# Altium PCB Terra_Spray.PcbDoc
Units mil, origin at the board's own origin, x right, y up, seen from the top; angles counter-clockwise.
Board outline 1779.53 x 1536.61 mil, 4 copper layers (Top Layer, GND, Power, Bottom Layer), stack 61.811 mil thick; 61 components, 32 nets, 213 pads, 377 vias.
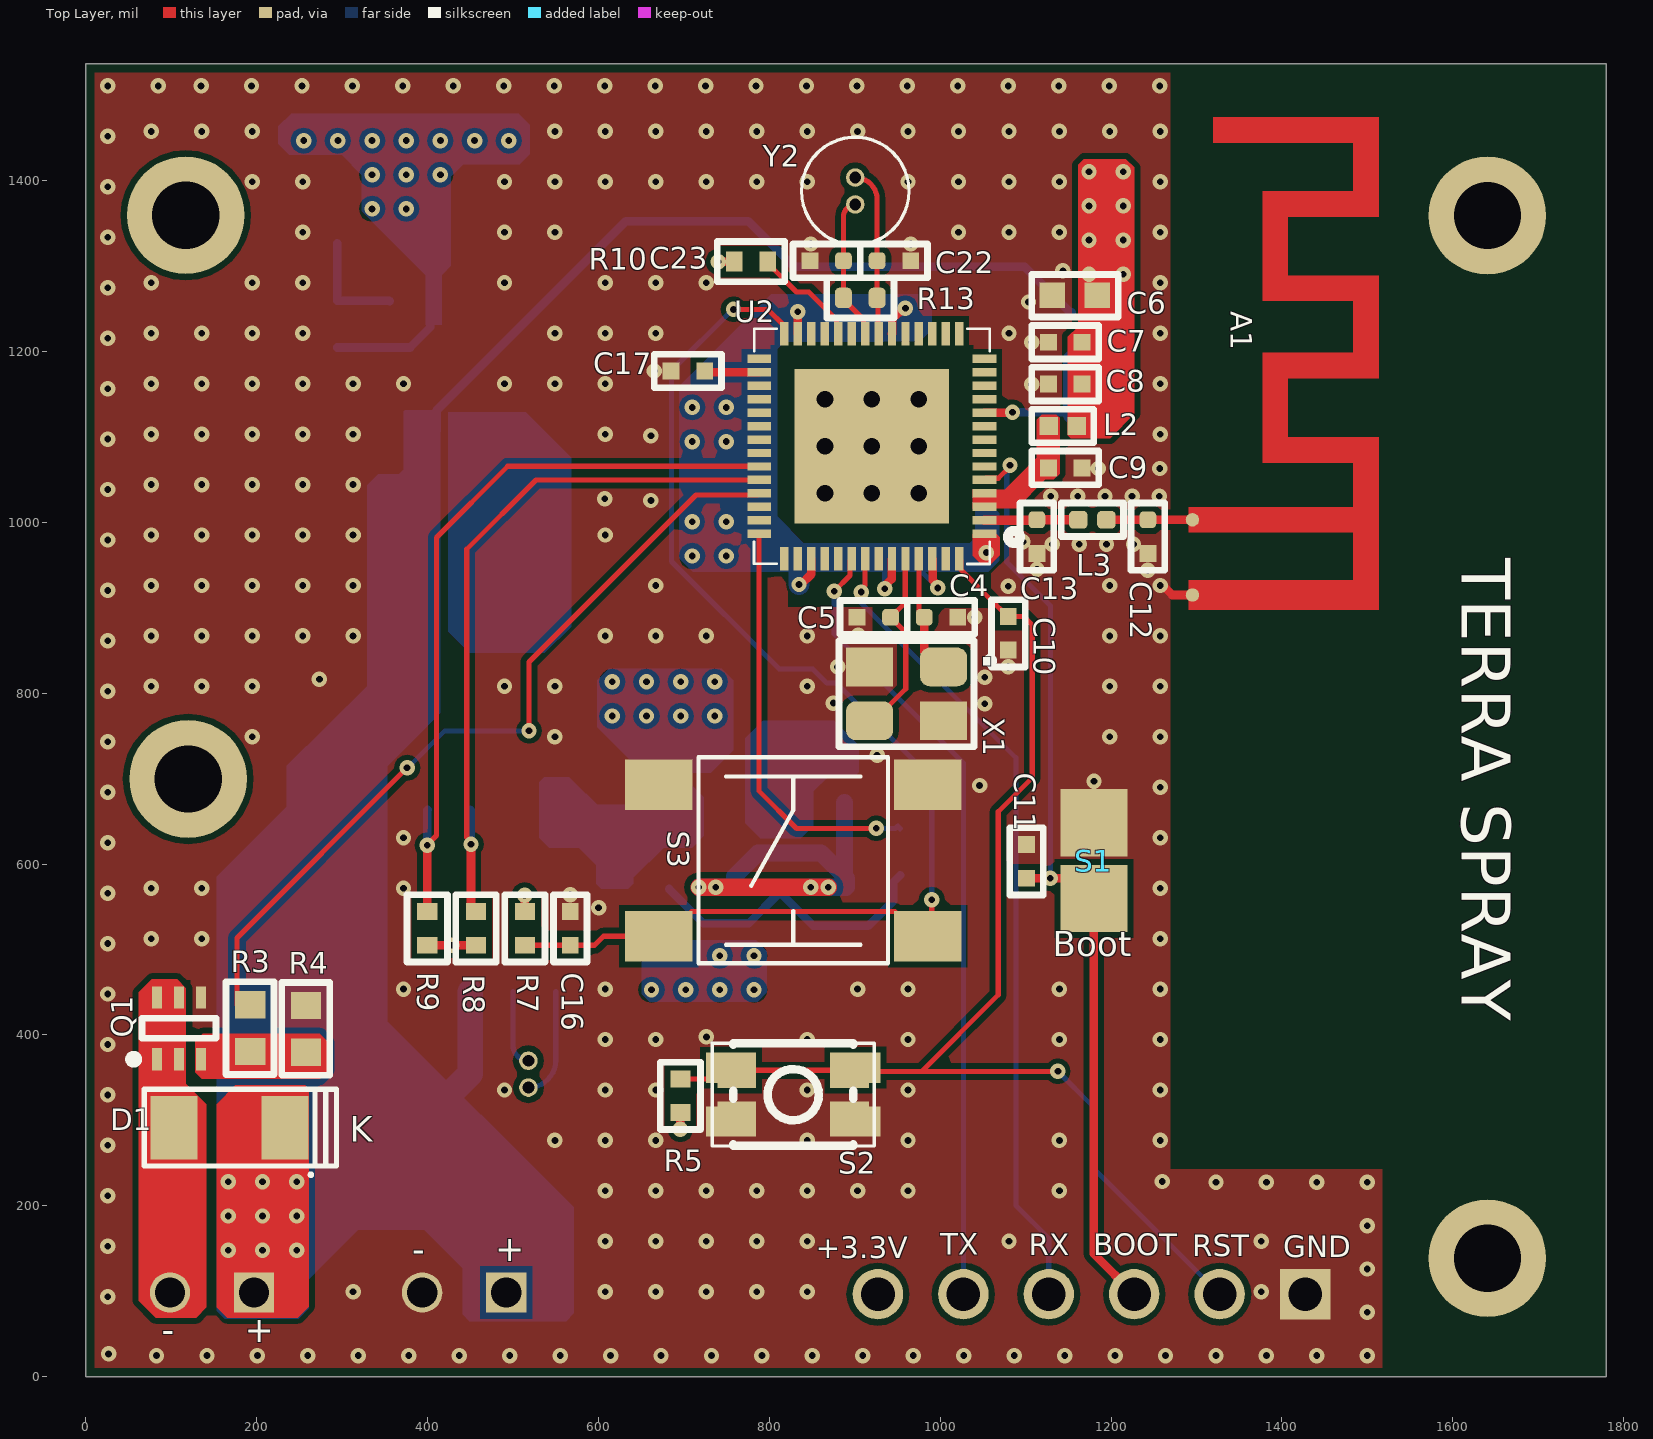
[diagram p0: Top Layer view]
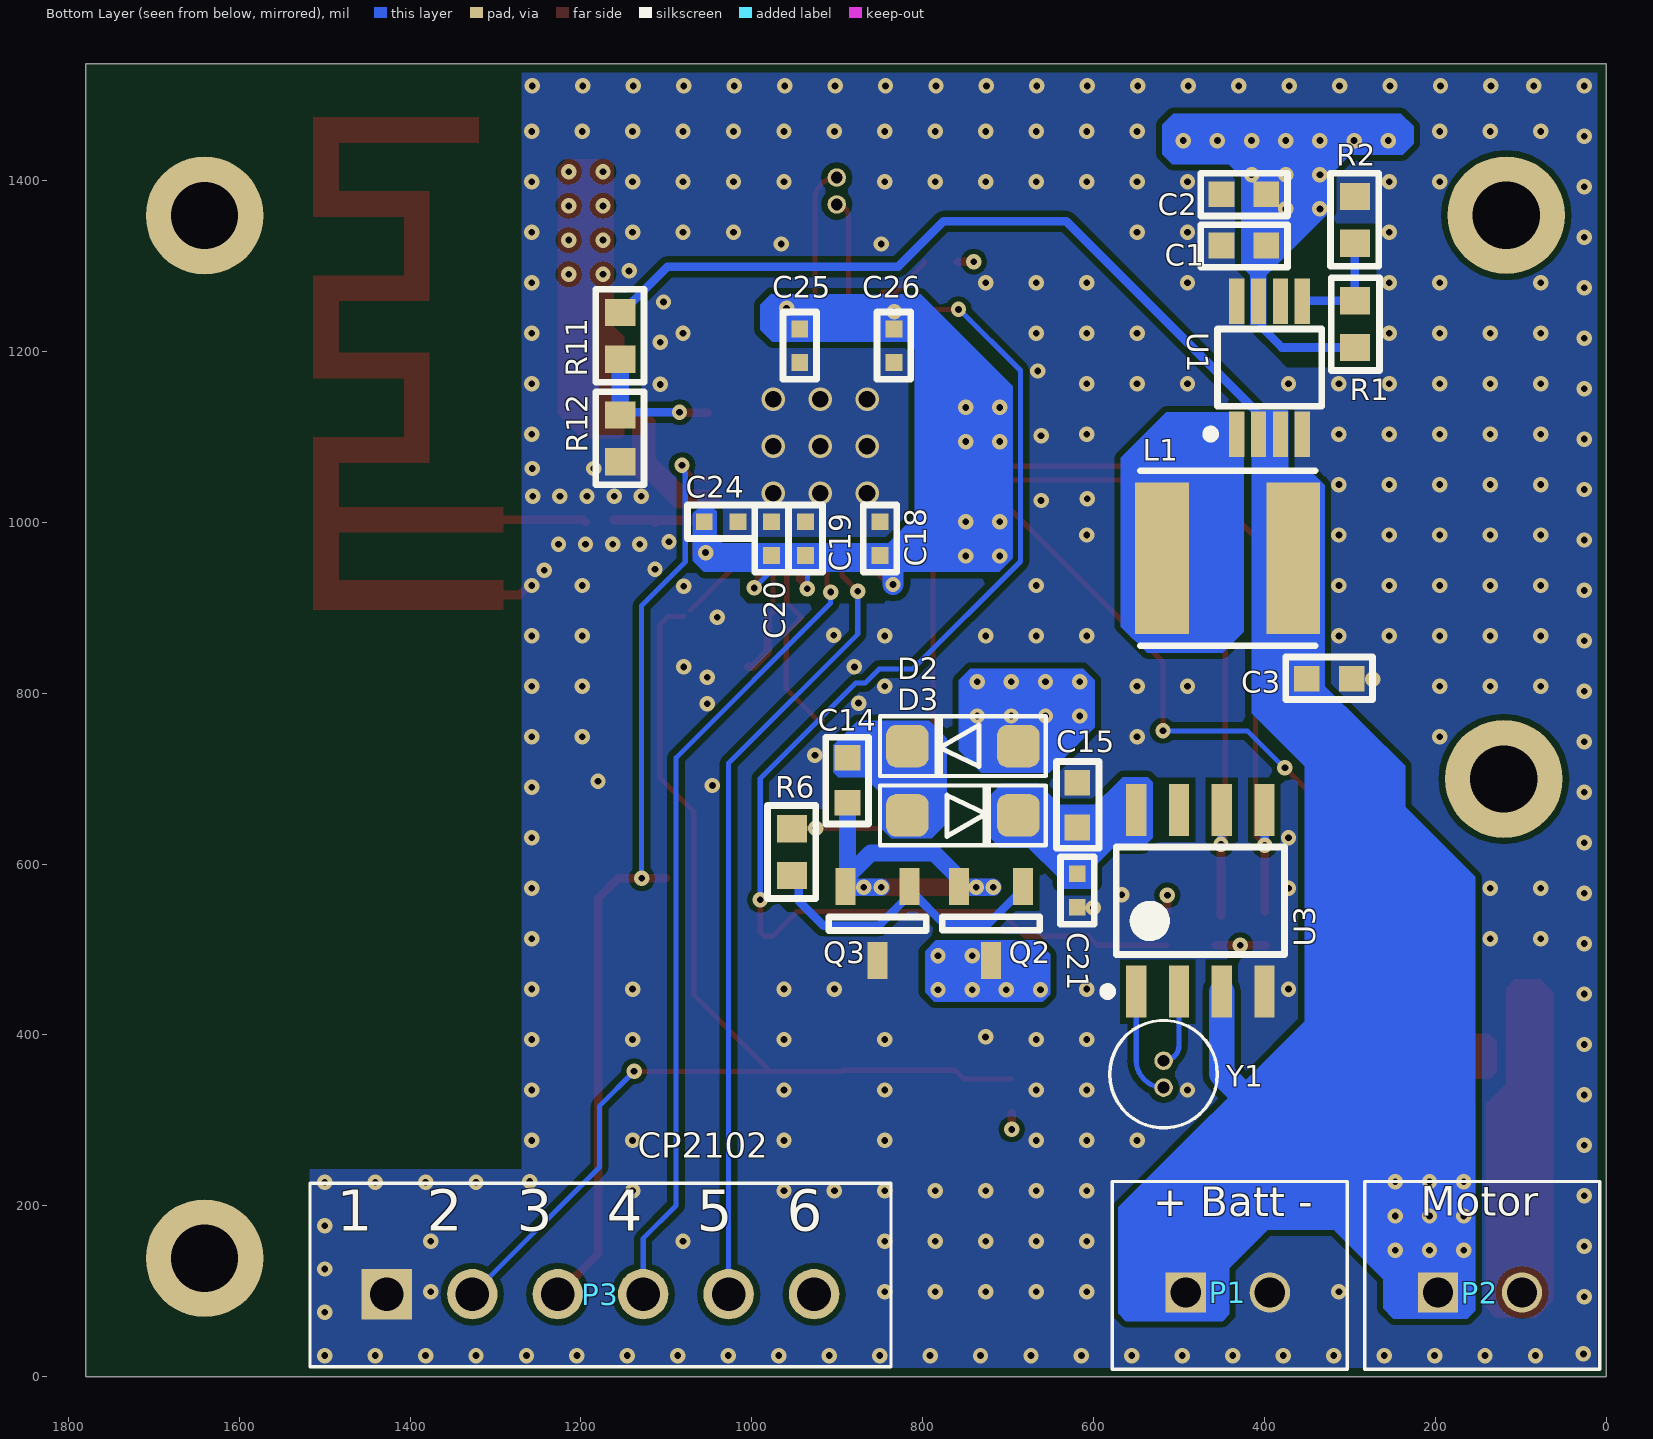
[diagram p1: Bottom Layer view, seen from below]
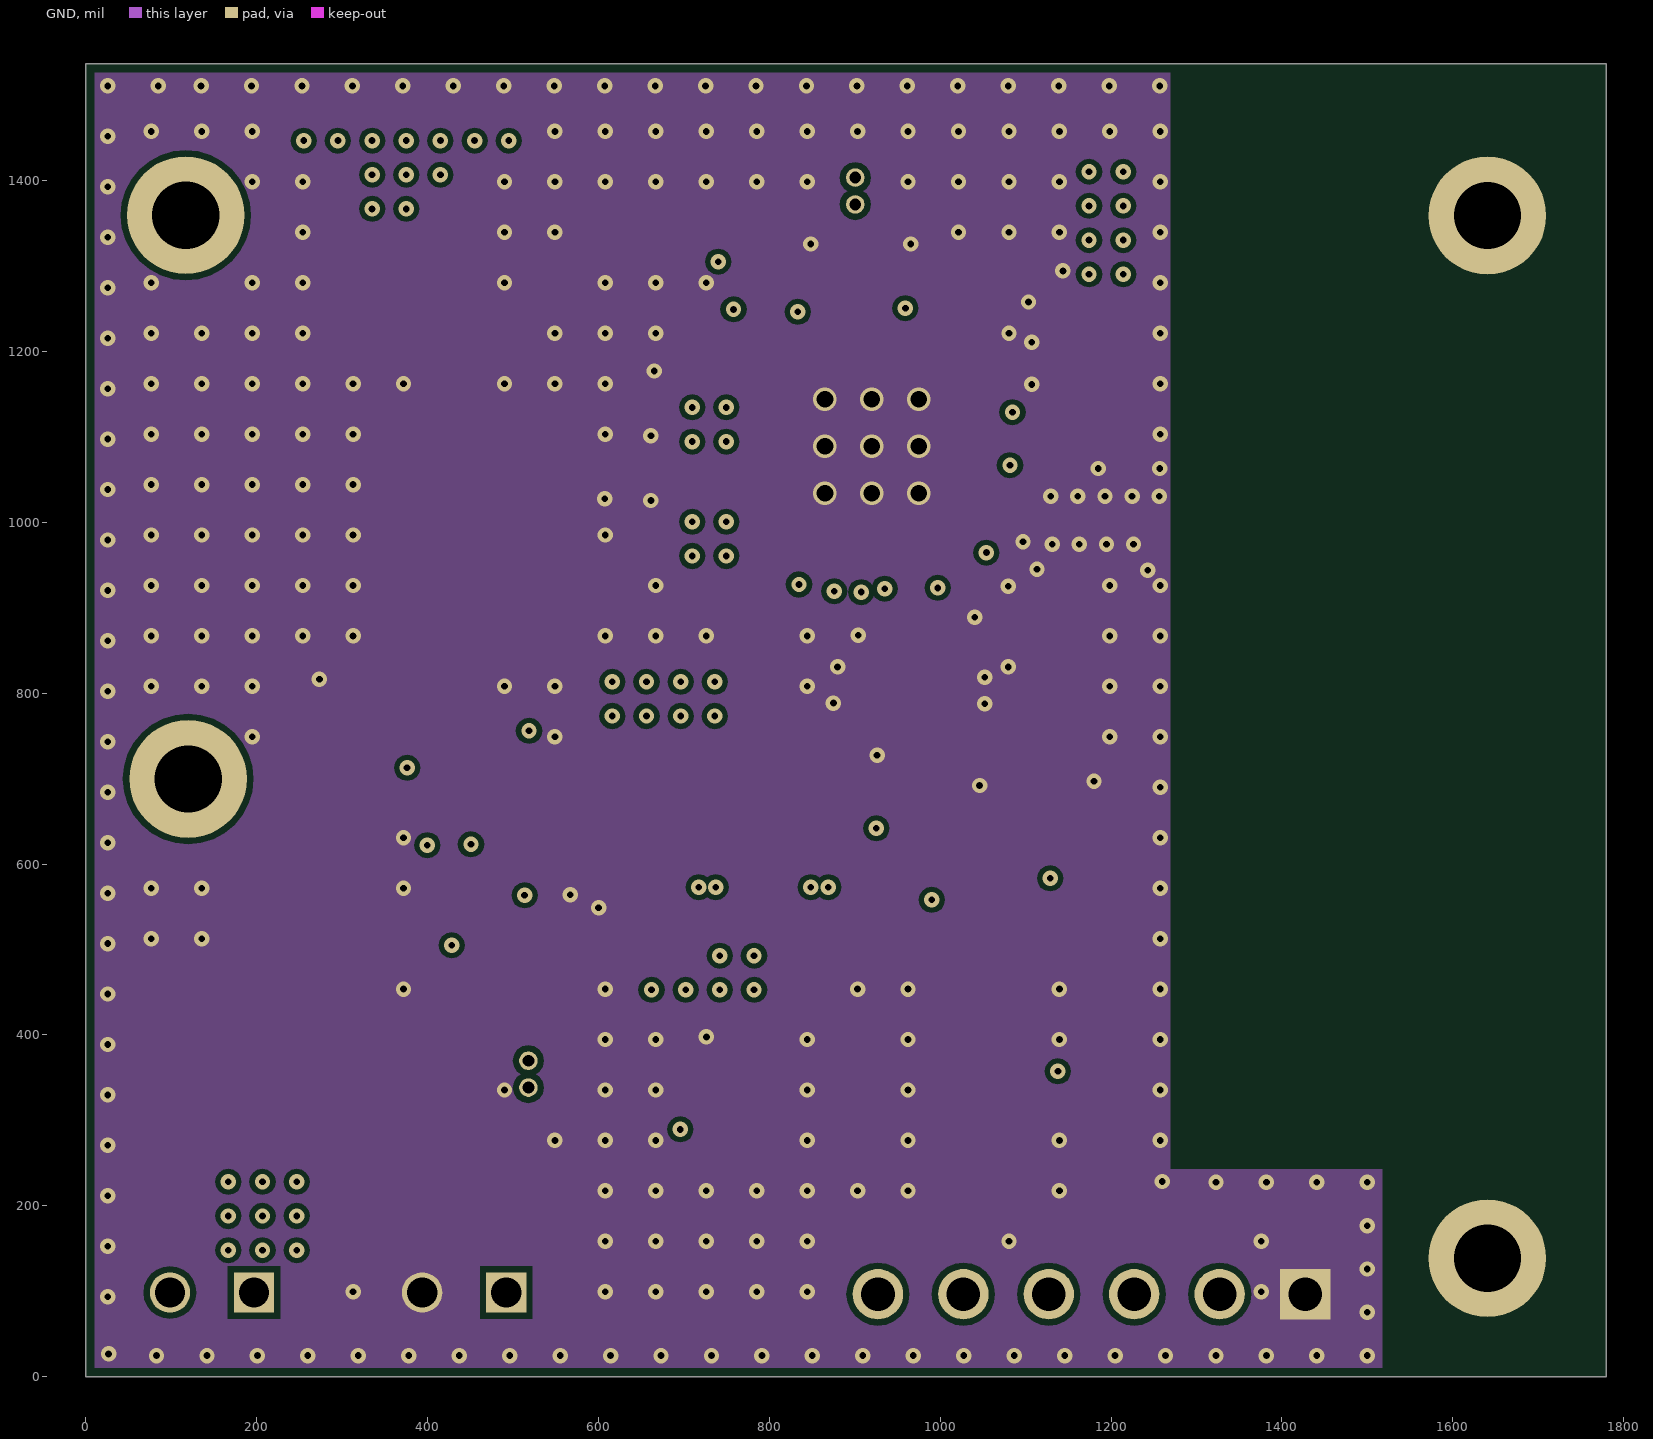
[diagram p2: GND]
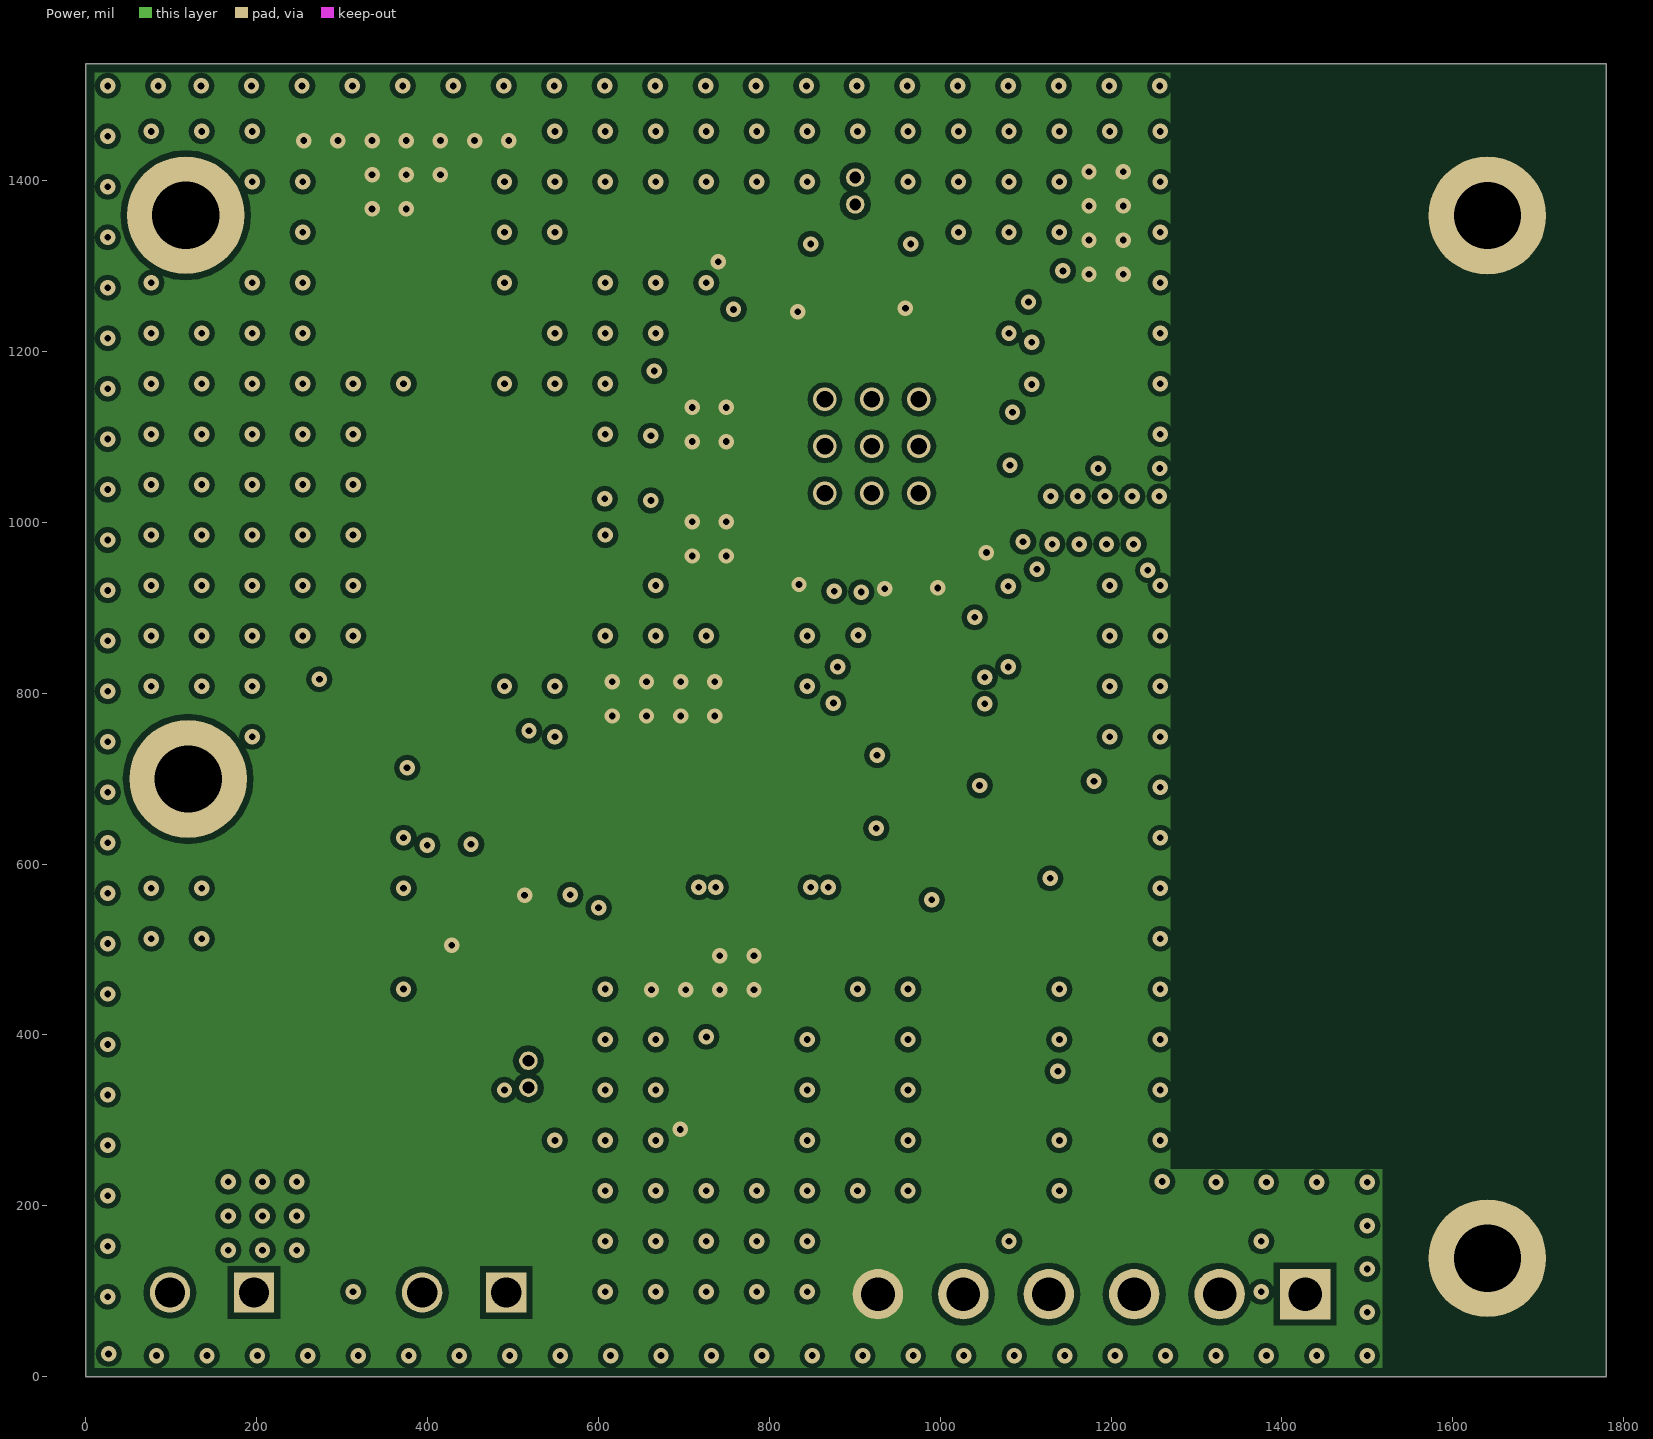
[diagram p3: Power]

## Layer stack, top to bottom
Top Solder: solder mask 0.4, Solder Resist, Dk 3.5
Top Layer: signal copper 1.378
Dielectric 2: prepreg 0.689, PP-006, Dk 4.1
GND: signal copper 7.874
Dielectric 1: dielectric 41.9291, FR-4, Dk 4.8
Power: signal copper 7.874
Dielectric 3: prepreg 0.689, PP-006, Dk 4.1
Bottom Layer: signal copper 1.378
Bottom Solder: solder mask 0.4, Solder Resist, Dk 3.5

## Board outline
0,0 0,1536.61 1779.53,1536.61 1779.53,0

## Design rules (kind name [scope] priority, off if disabled: settings)
BoardOutlineClearance [All] p1: gap=10 ignorepadtopadclearanceinfootprint=FALSE except(0: Arc-SplitContinuation Track-SplitContinuation SMDPad-SplitContinuation THPad-SplitContinuation Via-SplitContinuation Fill-SplitContinuation Poly-SplitContinuation Region-SplitContinuation Text-SplitContinuation)
Clearance [All] p1: gap=7 ignorepadtopadclearanceinfootprint=TRUE except(5: Arc-SMDPad Track-SMDPad; 6: Track-Track Track-Region SMDPad-Region Via-Poly; 10: Arc-Arc Arc-Track)
MinimumSolderMaskSliver [All] p1: minsoldermaskwidth=1
PolygonConnect [All] p1: connectstyle=Direct reliefconductorwidth=10 reliefentries=4 polygonreliefangle="90 Angle" airgapwidth=10
RoutingVias [All] p1: holewidth=14 width=28 viastyle="Through Hole" minholewidth=7.87 minwidth=17.99 maxholewidth=28 maxwidth=50
SilkToSilkClearance [All] p1: silktosilkclearance=1
SilkToSolderMaskClearance [IsPad] p1: minsilkscreentomaskgap=0 clearancetoexposedcopper=TRUE
SolderMaskExpansion [All] p1: expansion=4 istentingtop=FALSE
Width [All] p1: maxlimit=40 minlimit=6 preferedwidth=6 minimp=50.000000 maximp=50.000000 favimp=50.000000
27 further rules are at their usual default settings.

## Components (designator, comment, footprint, x,y, rotation, side; value= is the part's Value field where it differs from the comment)
A1 "Antenna_1" "ESP32 ANT" 1295.28,958.92 r270 top
C1 "Capacitor" CAPC0603 424,1324 r180 bottom value=22uF
C2 "Capacitor" CAPC0603 424,1384 r180 bottom value=22uF
C3 "Capacitor" CAPC0603 324,817 r0 bottom value=22uF
C4 "Cap" CAPC0402#1 1000.98,888.78 r180 top value=22pF
C5 "Cap" CAPC0402#1 922.24,888.78 r0 top value=22pF
C6 "Capacitor" CAPC0603 1157.48,1265.75 r0 top value=10uF
C7 "Capacitor" CAPC0402#2 1146.42,1210.75 r0 top value=1uF
C8 "Cap" CAPC0402#2 1146.42,1161.75 r0 top value=100nF
C9 "Cap" CAPC0402#2 1146.42,1063.75 r0 top value=100nF
C10 "Cap" CAPC0402#2 1079.76,870.05 r270 top value=100nF
C11 "Cap" CAPC0402#2 1101,603 r270 top value=100nF
C12 "Capacitor" CAPC0402#1 1243.11,983.27 r90 top
C13 "Capacitor" CAPC0402#1 1113.19,983.27 r90 top
C14 "Capacitor" CAPC0603 888,698 r270 bottom value=10uF
C15 "Capacitor" CAPC0603 619,669 r90 bottom value=10uF
C16 "Cap" CAPC0402#2 567,524.6 r270 top value=100nF
C17 "Cap" CAPC0402#2 704.72,1177.17 r180 top value=100nF
C18 "Cap" CAPC0402#2 850,981 r90 bottom value=100nF
C19 "Cap" CAPC0402#2 937,981 r90 bottom value=100nF
C20 "Cap" CAPC0402#2 977,981 r90 bottom value=100nF
C21 "Cap" CAPC0402#2 619,569 r270 bottom value=100nF
C22 "Cap" capc0402 945.87,1306.1 r180 top value=18pF
C23 "Cap" capc0402 867.13,1306.1 r0 top value=18pF
C24 "Cap" CAPC0402#2 1036,1000.69 r180 bottom value=100nF
C25 "Cap" CAPC0402#2 943.9,1206.69 r270 bottom value=100nF
C26 "Cap" CAPC0402#2 833.66,1206.69 r270 bottom value=100nF
D1 "1N4007W" SOD-123 168.31,291.34 r180 top
D2 "B0540W" "SOD123 - DUPLICATE" 753,738 r0 bottom
D3 "B0540W" "SOD123 - DUPLICATE" 753,657 r180 bottom
L1 "Inductor" INDP5050X20N 443,958 r0 bottom value=2.2uH-3A
L2 "Inductor" "INDUCTOR 0402"#1 1143.46,1112.75 r0 top
L3 "Inductor" "INDUCTOR 0402"#2 1178.15,1002.95 r0 top
P1 "+ Batt -" "2 PIN 2.5MM - HEADER" 442.91,98.43 r180 bottom
P2 "Motor" "2 PIN 2.5MM - HEADER" 147.64,98.43 r180 bottom locked
P3 "CP2102" "HEADER 6X1" 1177.17,96.46 r180 bottom
Q1 "Mosfet" SOT-363 108.98,407.71 r90 top
Q2 "NPN BJT Transistor" SOT-23 720,530.42 r270 bottom
Q3 "PNP BJT Transistor" SOT-23 853,530.11 r270 bottom
R1 "Resistor" RESC0603 294,1232 r270 bottom value=453K
R2 "Resistor" RESC0603 294,1354.07 r90 bottom value=100K
R3 "Resistor" RESC0603 192.51,407.94 r90 top value=100E
R4 "Resistor" RESC0603 257.75,407 r90 top value=100K
R5 "Resistor" RESC0402#1 695.87,328.74 r90 top value=10K
R6 "Resistor" RESC0603 953,614 r90 bottom value=820E
R7 "Resistor" RESC0402#1 513.82,524.61 r270 top value=10K
R8 "Resistor" RESC0402#1 456.72,524.61 r90 top value=10K
R9 "Resistor" RESC0402#1 399.61,524.61 r90 top value=10K
R10 "Resistor" RESC0402#1 778.54,1305.12 r180 top value=10K
R11 "Resistor" RESC0603 1153.99,1218.36 r90 bottom value=220K
R12 "Resistor" RESC0603 1153.99,1098.36 r90 bottom value=309K
R13 "Resistor" RESC0402#2 906.5,1262.8 r0 top value=1M
S1 "Boot" "SWITCH REPLACEMENT" 1180,604 r270 top
S2 "Button" 434153017835 827.99,330 r180 top locked value=RESET
S3 "WIFI" "FSMJ - SMD - WIFI" 828,604 r90 top
U1 "PAM2401SCADJ" "8-TSSOP, 8-MSOP" 394,1181 r90 bottom
U2 "ESP32-S2" QFN56-7X7MM 920,1089 r180 top
U3 "DS1307Z+" SOIC-8 475,557 r90 bottom
X1 "CRYSTAL_1" CRYSTAL_3225 960.63,799.21 r180 top
Y1 "32.768KHz" 32.728KHZ 518,354 r270 bottom
Y2 "32.768KHz" 32.728KHZ 900.59,1387.8 r270 top

## Footprints (in the part's own frame and the unit in brackets; to place one, negate y for a bottom-side part, rotate by r counter-clockwise, add the part's x,y. Pads: shape width x height; smd on the part's side, far side on the other; paste and mask are expansions set on the pad)
"2 PIN 2.5MM - HEADER" [mm]
  rect 1.2x1.2 hole 0.9: 1(-1.25,0)
  round 1.2 hole 0.9: 2(1.25,0)
  silkscreen extent -3.43,-2.29 3.56,3.3, body extent -2.54,-1.27 2.54,1.27, height 8.49
"8-TSSOP, 8-MSOP" [mm] "TSOP, 8-Leads, Body 3.00x3.00mm, Pitch 0.65mm, IPC Medium Density"
  rect 1.35x0.45 smd: 1(-1.975,0.975) 2(-1.975,0.325) 3(-1.975,-0.325) 4(-1.975,-0.975) 5(1.975,-0.975) 6(1.975,-0.325) 7(1.975,0.325) 8(1.975,0.975)
  silkscreen extent -2.1,-1.55 1.15,1.88, body extent -2.45,-1.55 2.45,1.55, height 1.1
32.728KHZ [mm]
  round 0.55 hole 0.35: 1(-0.4,0) 2(0.4,0)
  silkscreen extent -1.6,-1.6 1.6,1.6, body extent -1.46,-1.47 1.48,1.47, height 8.05
434153017835 [mm]
  rect 1.1x0.9 smd: 1(-2.05,-0.8) 2(-2.05,0.8) 3(2.05,-0.8) 4(2.05,0.8)
  rect 1.15x1.05 smd: 1(-1.675,-0.725) 2(-1.675,0.725) 3(1.675,-0.725) 4(1.675,0.725)
  silkscreen extent -2.41,-1.52 2.41,1.52, body extent -2.3,-1.5 2.3,1.5, height 2.1
CAPC0402#1 [mm]
  rect 0.5x0.5 smd: 1(-0.5,0)
  rrect50% 0.5x0.5 smd: 2(0.5,0)
  silkscreen extent -1,-0.5 1,0.5, body extent -0.5,-0.25 0.5,0.25, height 0.56
CAPC0402#2 [mm]
  rect 0.5x0.5 smd: 1(-0.5,0) 2(0.5,0)
  silkscreen extent -1,-0.5 1,0.5, body extent -0.5,-0.25 0.5,0.25, height 0.56
capc0402 [mm]
  rect 0.5x0.5 smd: 1(-0.5,0)
  rrect50% 0.5x0.5 smd: 2(0.5,0)
  silkscreen extent -1,-0.5 1,0.5, body extent -0.5,-0.25 0.5,0.25, height 0.56
CAPC0603 [mil]
  rect 30x30 smd: 1(-26.26,0) 2(26.26,0)
  silkscreen extent -50,-25 51,24, body extent -31,-16 31,16, height 12
CRYSTAL_3225 [mm] "3225 pack"
  rrect50% 1.4x1.15 smd: 1(-1.1,-0.8) 3(1.1,0.8)
  rect 1.4x1.15 smd: 2(1.1,-0.8) 4(-1.1,0.8)
  silkscreen extent -2.59,-1.57 2.01,1.57, body extent -1.6,-1.23 1.6,1.27, height 0.6
"ESP32 ANT" [mm]
  round 0.4 smd paste-0.2: 1(-1.118,0) 2(1.118,0)
  Top Layer region: -1.495,-0.114 -0.741,-0.114 -0.741,4.786 0.678,4.786 0.678,-0.114 1.559,-0.114 1.559,5.54 -3.569,5.54 -3.569,2.84 -5.326,2.84 -5.326,5.54 -8.38,5.54 -8.38,2.84 -10.126,2.84 -10.126,5.54 -13.08,5.54 -13.08,0.612 -12.326,0.612 -12.326,4.786 -10.88,4.786 -10.88,2.086 -7.626,2.086 -7.626,4.786 -6.08,4.786 -6.08,2.086 -2.815,2.086 -2.815,4.786 -1.495,4.786 -1.495,-0.114
"FSMJ - SMD - WIFI" [mm]
  rect 1.5x2 smd: 1(2.25,4) 2(2.25,-4) 3(-2.25,4) 4(-2.25,-4)
  silkscreen extent -3.05,-2.82 3.07,2.82, body extent -3,-4.5 3,4.5, height 5.1
"HEADER 6X1" [mm]
  rect 1.5x1.5 hole 1: 1(-6.35,0)
  round 1.5 hole 1: 2(-3.81,0) 3(-1.27,0) 4(1.27,0) 5(3.81,0) 6(6.35,0)
  silkscreen extent -8.64,-2.16 8.64,3.3, body extent -7.62,-1.27 7.62,1.27, height 8.59
INDP5050X20N [mm] "Precision Wire Wound Inductor, 2-Leads, Body 5.00x5.00mm, IPC Medium Density"
  rect 1.6x4.5 smd: 1(-1.95,0) 2(1.95,0)
  silkscreen extent -2.6,-2.6 2.6,2.6, body extent -2.6,-2.5 2.6,2.5, height 2.1
"INDUCTOR 0402"#1 [mm]
  rect 0.55x0.53 smd: 1(0.419,0) 2(-0.419,0)
  silkscreen extent -0.92,-0.5 0.92,0.5, body extent -0.5,-0.25 0.5,0.25, height 0.55
"INDUCTOR 0402"#2 [mm]
  rrect50% 0.55x0.53 smd: 1(0.419,0) 2(-0.419,0)
  silkscreen extent -0.92,-0.5 0.92,0.5, body extent -0.5,-0.25 0.5,0.25, height 0.55
QFN56-7X7MM [mm]
  rect 0.7x0.25 smd: 1(-3.35,2.6) 2(-3.35,2.2) 3(-3.35,1.8) 4(-3.35,1.4) 5(-3.35,1) 6(-3.35,0.6) 7(-3.35,0.2) 8(-3.35,-0.2) 9(-3.35,-0.6) 10(-3.35,-1) 11(-3.35,-1.4) 12(-3.35,-1.8) 13(-3.35,-2.2) 14(-3.35,-2.6) 29(3.35,-2.6) 30(3.35,-2.2) 31(3.35,-1.8) 32(3.35,-1.4) 33(3.35,-1) 34(3.35,-0.6) 35(3.35,-0.2) 36(3.35,0.2) 37(3.35,0.6) 38(3.35,1) 39(3.35,1.4) 40(3.35,1.8) 41(3.35,2.2) 42(3.35,2.6)
  rect 0.25x0.7 smd: 15(-2.6,-3.35) 16(-2.2,-3.35) 17(-1.8,-3.35) 18(-1.4,-3.35) 19(-1,-3.35) 20(-0.6,-3.35) 21(-0.2,-3.35) 22(0.2,-3.35) 23(0.6,-3.35) 24(1,-3.35) 25(1.4,-3.35) 26(1.8,-3.35) 27(2.2,-3.35) 28(2.6,-3.35) 43(2.6,3.35) 44(2.2,3.35) 45(1.8,3.35) 46(1.4,3.35) 47(1,3.35) 48(0.6,3.35) 49(0.2,3.35) 50(-0.2,3.35) 51(-0.6,3.35) 52(-1,3.35) 53(-1.4,3.35) 54(-1.8,3.35) 55(-2.2,3.35) 56(-2.6,3.35)
  rect 4.6x4.6 smd: 57(0,0)
  silkscreen extent -4.4,-3.5 3.5,3.5, body extent -3.5,-3.5 3.5,3.5, height 0.75
RESC0402#1 [mm]
  rect 0.5x0.6 smd: 1(0.5,0) 2(-0.5,0)
  silkscreen extent -1,-0.6 1,0.6, body extent -0.5,-0.25 0.5,0.25, height 0.4
RESC0402#2 [mm]
  rrect50% 0.5x0.6 smd: 1(0.5,0) 2(-0.5,0)
  silkscreen extent -1,-0.6 1,0.6, body extent -0.5,-0.25 0.5,0.25, height 0.4
RESC0603 [mm]
  rect 0.81x0.9 smd: 1(-0.695,0) 2(0.695,0)
  silkscreen extent -1.38,-0.71 1.38,0.73, body extent -0.8,-0.4 0.8,0.4, height 0.45
"SOD123 - DUPLICATE" [mil]
  rrect50% 50x50 smd: A(-65,0) K(65,0)
  silkscreen extent -97,-35 97,35, body extent -77,-35 77,35, height 47
SOD-123 [mm] "SODFL, 2-Leads, Body 1.70x3.70mm, IPC Medium Density"
  rect 1.4x1.9 smd: 1(-1.65,0) 2(1.65,0)
  silkscreen extent -3.17,-1.14 2.54,1.45, body extent -1.85,-0.95 1.85,0.95, height 1.7
SOIC-8 [mm] "SOIC, 8-Leads, Body 4.91x3.90mm, Pitch 1.27mm, IPC Medium Density"
  rect 1.55x0.6 smd: 1(-2.7,1.905) 2(-2.7,0.635) 3(-2.7,-0.635) 4(-2.7,-1.905) 5(2.7,-1.905) 6(2.7,-0.635) 7(2.7,0.635) 8(2.7,1.905)
  silkscreen extent -2.82,-2.5 1.6,2.88, body extent -3,-2.5 3,2.5, height 1.75
SOT-23 [mm]
  rect 1.1x0.6 smd: 1(-1.1,0.95) 2(-1.1,-0.95) 3(1.1,0)
  silkscreen extent -0.2,-1.45 0.2,1.45, body extent -1.42,-1.5 1.42,1.5, height 1.2
SOT-363 [mm] "SOT23, 6-Leads, Body 2.00x2.10mm, Pitch 0.65mm, IPC Medium Density"
  rect 0.66x0.3 smd: 1(-0.92,0.65) 2(-0.92,0) 3(-0.92,-0.65) 4(0.92,-0.65) 5(0.92,0) 6(0.92,0.65)
  silkscreen extent -1.04,-1.1 0.3,1.47, body extent -1.1,-1.1 1.1,1.1, height 1.1
"SWITCH REPLACEMENT" [mm]
  rect 2x2 smd: 1(-1.125,0) 2(1.125,0)

## Part data
A1: "PCB Antenna", LatestRevisionDate=17-Jul-2002, LatestRevisionNote="Re-released for DXP Platform.", PackageReference=PIN1, Published=24-Mar-1999, Publisher="Altium Limited"
C1 C2 C3: "Ceramic Capacitor,22uF,0603,6.3V", Case/Package=0603
C4 C5: "Ceramic Capacitor,22pF,0402,50V", Case/Package=0402
C6 C14 C15: "Ceramic Capacitor,10uF,0603,10V", Case/Package=0603
C7: "Ceramic Capacitor,1uF,0402,6.3V", Case/Package=0402
C8: library part Capacitor, "Ceramic Capacitor,100nF,0402,6.3V", Case/Package=0402
C9 C10 C17 C18 C19 C20 C24 C25 C26: "Ceramic Capacitor,100nF,0402,6.3V", Case/Package=0402
C11: "Ceramic Capacitor,100nF,0402,16V", Case/Package=0402
C12 C13: Case/Package=0402
C16 C21: "Ceramic Capacitor,100nF,0402,6.3 / V", Case/Package=0402
C22 C23: "Ceramic Capacitor,18pF,0402,50V", Case/Package=0402
D1: library part BAT54HT1G, "Rectifiers RECTIFIER DIODE 1A 1000V", Part No=CGRM4007-G, ComponentLink1Description=http://www.fairchildsemi.com/ds/BA/BAT54HT1G.pdf, ComponentLink1URL=http://www.fairchildsemi.com/ds/BA/BAT54HT1G.pdf
D2 D3: library part Diode, "Diode Schottky 40V 0.5A 2-Pin SOD-123 T/R", Average Rectified Current=500mA, Forward Voltage=620mV, Manufacturer 1=Diodes, Max Forward Surge Current (Ifsm)=5.5A, Max Operating Temperature=150°C, Max Power Dissipation=410mW, Max Repetitive Reverse Voltage (Vrrm)=40V, Max Reverse Current=20uA, Min Operating Temperature=-65°C, Package Quantity=3000, Element Configuration=Single, Forward Current=500mA, Height=1.25mm, Lead Free="Lead Free", Length=2.85mm, Manufacturer Part Number=B0540W, Max Reverse Voltage (DC)=40V, Mount="Surface Mount", Number of Pins=2, Output Current=500mA
L1: library part 74404052022, "WURTH ELEKTRONIK - 74404052022 - Power Inductor (SMD), 2.2 µH, 3 A, Semishielded, 3.6 A, WE-LQS Series, 5mm x 5mm x 2mm", Case/Package=Nonstandard, Current Rating=3A, DC Resistance (DCR)=31.6mR, Inductance=2.2uH, Manufacturer 1="Wurth Electronics", Max Operating Temperature=125°C, Min Operating Temperature=-40°C, Resistor Type=Wirewound, Saturation Current=3.6A, Self Resonant Frequency=88MHz, Test Frequency=100kHz, Tolerance=30%, ComponentLink1Description=http://www.farnell.com/datasheets/2618696.pdf?src-supplier=Farnell, ComponentLink1URL=http://www.farnell.com/datasheets/2618696.pdf?src-supplier=Farnell, ComponentLink2Description=https://katalog.we-online.de/pbs/datasheet/74404052022.pdf?src-supplier=Digi-Key, ComponentLink2URL=https://katalog.we-online.de/pbs/datasheet/74404052022.pdf?src-supplier=Digi-Key, ComponentLink3Description=http://www.farnell.com/datasheets/2618696.pdf?src-supplier=Newark, ComponentLink3URL=http://www.farnell.com/datasheets/2618696.pdf?src-supplier=Newark, DigiKey=732-7241-1-ND, Height - Seated (Max)=0.079inch, Length=0.197inch, Mount="Surface Mount", P/N=74404052022, Packaging="Tape and Reel", Pricing 1="1=1.23000, 50=1.13100, 250=1.06400, 500=0.95200, 1000=0.78400 (USD)", RoHS=Yes, Shielding=Shielded, Stock 1=1338, Supplier 1=Digi-Key, Width=0.197inch
L2 L3: "2nH ±0.3nH 900mA 120mΩ 0402 Inductors (SMD) RoHS", Case Code (Imperial)=0402, Case Code (Metric)=1005, Current=900mA, DC Resistance (DCR)=120mR, Inductance=2nH, Manufacturer 1=Murata, Manufacturer Part Number=LQG15HN2N0S02D, Max Operating Temperature=125°C, Min Operating Temperature=-55°C, Package Quantity=10000, Self Resonant Frequency=6GHz, Supplier Part Number 1=C97984, Test Frequency=100MHz, Case/Package=0402, Category 1="Fixed Inductors", ComponentLink1Description=https://datasheet.ciiva.com/11799/0900766b8090d3b8-11799042.pdf?src-supplier=RSComponents, ComponentLink1URL=https://datasheet.ciiva.com/11799/0900766b8090d3b8-11799042.pdf?src-supplier=RSComponents, ComponentLink2Description=https://datasheet.ciiva.com/4976/o05e-4976477.pdf?src-supplier=Mouser, ComponentLink2URL=https://datasheet.ciiva.com/4976/o05e-4976477.pdf?src-supplier=Mouser, ComponentLink3Description=https://datasheet.ciiva.com/8510/l0075s0083lqg15hn-8510907.pdf?src-supplier=Avnet, ComponentLink3URL=https://datasheet.ciiva.com/8510/l0075s0083lqg15hn-8510907.pdf?src-supplier=Avnet, ComponentLink4Description=https://datasheet.ciiva.com/17279/l0075s0083lqg15hn-17279196.pdf?src-supplier=Avnet+Europe, ComponentLink4URL=https://datasheet.ciiva.com/17279/l0075s0083lqg15hn-17279196.pdf?src-supplier=Avnet+Europe, Core Material=Air, Current Rating=900mA, DC Current=900mA, Depth=0.55mm, Description 1="Fixed Inductors 0402 2.0nH", Height=0.5mm, Height - Seated (Max)=0.022inch, Length=1mm, Max DC Current=900mA, Military Standard=Not, Mount="Surface Mount", Number of Pins=2, Packaging="Tape and Reel", Pricing 1="50=0.00840, 500=0.00620, 1500=0.00580, 5000=0.00540, 25000=0.00520, 50000=0.00520, 50=0.00810, 500=0.00600, 1500=0.00560, 5000=0.00520, 25000=0.00500, 50000=0.00500, 50=0.04180, 500=0.03090, 1500=0.02890, 5000=0.02690, 25000=0.02600, 50000=0.02550, 50=0.03860, 500=0.02850, 1500=0.02670, 5000=0.02480, 25000=0.02400, 50000=0.02360, 50=0.00520, 500=0.00380, 1500=0.00360, 5000=0.00330, 25000=0.00320, 50000=0.00320, 50=0.00480, 500=0.00350, 1500=0.00330, 5000=0.00310, 25000=0.00300, 50000=0.00290, 50=0.04770, 500=0.03530, 1500=0.03300, 5000=0.03070, 25000=0.02970, 50000=0.02920, 50=0.65070, 500=0.48080, 1500=0.44960, 5000=0.41830, 25000=0.40450, 50000=0.39760, 50=0.02550, 500=0.01880, 1500=0.01760, 5000=0.01640, 25000=0.01580, 50000=0.01560, 50=0.46320, 500=0.34230, 1500=0.32010, 5000=0.29780, 25000=0.28800, 50000=0.28310, 50=0.05400, 500=0.03990, 1500=0.03730, 5000=0.03470, 25000=0.03360, 50000=0.03300, 50=0.00840, 500=0.00620, 1500=0.00580, 5000=0.00540, 25000=0.00520, 50000=0.00510, 50=0.00616, 500=0.00455, 1500=0.00426, 5000=0.00396, 25000=0.00383, 50000=0.00376 (AUD)", Q Factor=8, Radiation Hardening=No, REACH SVHC="No SVHC", RoHS 1=Yes, Shielding=Unshielded, Stock 1=84500, Supplier 1=LCSC, Termination=SMD/SMT, Width=0.02inch
P1 S1: library part "Header 2", "Header, 2-Pin", LatestRevisionDate=17-Jul-2002, LatestRevisionNote="Re-released for DXP Platform.", Publisher="Altium Limited"
P2: "Motor, General Kind", LatestRevisionDate=17-Jul-2002, LatestRevisionNote="Re-released for DXP Platform.", PackageDescription="Capacitor (Radial); 2 Leads", PackageReference=RB5-10.5, Published=24-Mar-1999, Publisher="Altium Limited"
P3: library part "Header 6", "Header, 6-Pin", LatestRevisionDate=17-Jul-2002, LatestRevisionNote="Re-released for DXP Platform.", Publisher="Altium Limited"
Q1: library part NTJS3157NT1G, "N-Channel 20V 3.2A (Ta) 1W (Ta) Surface Mount SC-88/SC70-6/SOT-363", Part No=NTJS3157NT1G
Q2: "Bipolar Transistors - BJT SOT-23 NPN", Case/Package=SOT-23, Current Rating=200mA, Manufacturer Part Number=MMBT3904, Max Breakdown Voltage=40V, Max Power Dissipation=350mW, Min Operating Temperature=-55°C, Category=BJTs, ComponentLink1Description=https://datasheet.ciiva.com/971/mmbt3904-971892.pdf?src-supplier=Digi-Key, ComponentLink1URL=https://datasheet.ciiva.com/971/mmbt3904-971892.pdf?src-supplier=Digi-Key, ComponentLink2Description=https://datasheet.ciiva.com/971/mmbt3904-971893.pdf?src-supplier=Digi-Key, ComponentLink2URL=https://datasheet.ciiva.com/971/mmbt3904-971893.pdf?src-supplier=Digi-Key, ComponentLink3Description=https://datasheet.ciiva.com/22653/1922793-22653482.pdf?src-supplier=Element14, ComponentLink3URL=https://datasheet.ciiva.com/22653/1922793-22653482.pdf?src-supplier=Element14, ComponentLink4Description=https://datasheet.ciiva.com/971/mmbt3904-971891.pdf?src-supplier=Digi-Key, ComponentLink4URL=https://datasheet.ciiva.com/971/mmbt3904-971891.pdf?src-supplier=Digi-Key, ComponentLink5Description=https://datasheet.ciiva.com/26237/mmbt3904-26237242.pdf?src-supplier=Avnet+Europe, ComponentLink5URL=https://datasheet.ciiva.com/26237/mmbt3904-26237242.pdf?src-supplier=Avnet+Europe, ComponentLink6Description=https://datasheet.ciiva.com/7972/2n3904-7972669.pdf?src-supplier=Element14, ComponentLink6URL=https://datasheet.ciiva.com/7972/2n3904-7972669.pdf?src-supplier=Element14, ComponentLink7Description=https://datasheet.ciiva.com/16850/mmbt3904-16850397.pdf?src-supplier=Future+Electronics, ComponentLink7URL=https://datasheet.ciiva.com/16850/mmbt3904-16850397.pdf?src-supplier=Future+Electronics, ComponentLink8Description=https://datasheet.ciiva.com/11201/mmbt3904-11201775.pdf?src-supplier=Avnet, ComponentLink8URL=https://datasheet.ciiva.com/11201/mmbt3904-11201775.pdf?src-supplier=Avnet, Max Collector Current=200mA, Mount="Surface Mount", Polarity=NPN, Power Dissipation=350mW, Termination=SMD/SMT
Q3: "ON SEMICONDUCTOR - MMBT3906LT1G - Bipolar (BJT) Single Transistor, General Purpose, PNP, -40 V, 250 MHz, 225 mW, -200 mA, 300 hFE", Case/Package=SOT-23-3, Collector Base Voltage (VCBO)=40V, Collector Emitter Saturation Voltage=-400mV, Current Rating=-200mA, Emitter Base Voltage (VEBO)=5V, Frequency=250MHz, Manufacturer="ON Semiconductor", Manufacturer Part Number=MMBT3906, Max Collector Current=200mA, Max Operating Temperature=150°C, Max Power Dissipation=300mW, Min Operating Temperature=-55°C, Package Quantity=1, Voltage Rating (DC)=-40V, Category=BJTs, Collector Emitter Breakdown Voltage=40V, Collector Emitter Voltage (VCEO)=40V, ComponentLink1Description="Manufacturer Link", ComponentLink1URL=http://www.fairchildsemi.com/, ComponentLink2Description=Datasheet, ComponentLink2URL=http://www.fairchildsemi.com/ds/2N%2F2N3906.pdf, ComponentLink3Description=https://datasheet.ciiva.com/22664/1708270-22664162.pdf?src-supplier=Element14, ComponentLink3URL=https://datasheet.ciiva.com/22664/1708270-22664162.pdf?src-supplier=Element14, ComponentLink4Description=https://datasheet.ciiva.com/25998/mmbt3906lt1-d-25998821.pdf?src-supplier=Avnet+Europe, ComponentLink4URL=https://datasheet.ciiva.com/25998/mmbt3906lt1-d-25998821.pdf?src-supplier=Avnet+Europe, ComponentLink5Description=https://datasheet.ciiva.com/976/mmbt3906lt1-d-976359.pdf?src-supplier=Digi-Key, ComponentLink5URL=https://datasheet.ciiva.com/976/mmbt3906lt1-d-976359.pdf?src-supplier=Digi-Key, ComponentLink6Description=https://datasheet.ciiva.com/16387/mmbt3906lt1-d-16387191.pdf?src-supplier=Future+Electronics, ComponentLink6URL=https://datasheet.ciiva.com/16387/mmbt3906lt1-d-16387191.pdf?src-supplier=Future+Electronics, ComponentLink7Description=https://datasheet.ciiva.com/976/mmbt3906lt1-d-976360.pdf?src-supplier=Digi-Key, ComponentLink7URL=https://datasheet.ciiva.com/976/mmbt3906lt1-d-976360.pdf?src-supplier=Digi-Key, ComponentLink8Description=https://datasheet.ciiva.com/976/mmbt3906lt1-d-976361.pdf?src-supplier=Digi-Key, ComponentLink8URL=https://datasheet.ciiva.com/976/mmbt3906lt1-d-976361.pdf?src-supplier=Digi-Key, ComponentLink9Description=https://datasheet.ciiva.com/11201/mmbt3906lt1-d-11201803.pdf?src-supplier=Avnet, ComponentLink9URL=https://datasheet.ciiva.com/11201/mmbt3906lt1-d-11201803.pdf?src-supplier=Avnet, ComponentLink10Description=https://datasheet.ciiva.com/4721/mmbt3906lt1-d-4721423.pdf?src-supplier=Mouser, ComponentLink10URL=https://datasheet.ciiva.com/4721/mmbt3906lt1-d-4721423.pdf?src-supplier=Mouser, Contact Plating=Tin,Matte, Element Configuration=Single, Gain Bandwidth Product=250MHz, Height=0.94mm, hFE Min=60, Lead Free="Lead Free", Length=2.9mm, Max Breakdown Voltage=40V, Max Frequency=250MHz, Number of Elements=1, Number of Pins=3, Packaging="Tape and Reel", Polarity=PNP, Power Dissipation=300mW, Pricing 1="1=0.13000, 10=0.09200, 25=0.08800, 100=0.04960, 500=0.03892, 1000=0.02703 (USD)", Radiation Hardening=No, REACH SVHC="No SVHC", RoHS=Yes, Stock 1=148812, Supplier 1=Digi-Key, Transition Frequency=250MHz, Width=1.3mm
R1: "Thick Film Resistor -  453Kohm, 1%, 0603", Case/Package=0603
R2 R4: "Thick Film Resistor -  100Kohm, 1%, 0603", Case/Package=0603
R3: "Thick Film Resistor -  100ohm, 1%, 0603", Case/Package=0603
R5 R7 R8 R9 R10: "Thick Film Resistor -  10Kohm, 1%, 0402", Case/Package=0402
R6: "Thick Film Resistor -  820ohm, 1%, 0603", Case/Package=0603
R11: "Thick Film Resistor -  220Kohm, 1%, 0603", Case/Package=0603
R12: "Thick Film Resistor -  309Kohm, 1%, 0603", Case/Package=0603
R13: "Thick Film Resistor -  1Mohm, 1%, 0402", Case/Package=0402
S2: library part 434153017835, "SWITCH TACTILE SPST-NO 0.05A 12V", Manufacturer="Wurth Electronics", Max Operating Temperature=85°C, Min Operating Temperature=-40°C, Operating Force=350gf, Actuator Material="Polymer,Liquid Crystal Polymer", ComponentLink1Description=https://datasheet.ciiva.com/52202/434153017835-52202871.pdf?src-supplier=Digi-Key, ComponentLink1URL=https://datasheet.ciiva.com/52202/434153017835-52202871.pdf?src-supplier=Digi-Key, Contact Material=Steel, DigiKey=732-10143-1-ND, Illumination Type=Non-Illuminated, Mechanical Life=200000Cycles, Mount="Surface Mount", P/N=434153017835, Packaging="Tape and Reel", Pricing 1="1=0.56000, 100=0.47150, 500=0.41400, 1000=0.33350 (USD)", RoHS=Yes, Stock 1=48125, Supplier 1=Digi-Key, Switch Function=Off-Mom, Switch Travel=0.15mm, Throw Configuration=SPST
S3: library part FSM14J, "Pushbutton 6x6mm, Actuator Height off PCB, Vertical 9.50mm", Digi-Key Part Number=MJTP1138BTUBE-ND, Manufacturer Part Number=MJTP1138BTUBE, Package=None, Availability=Unavailable, MF="TE Connectivity", MP=FSM14J, Price=None, SnapEDA_Link=https://www.snapeda.com/parts/FSM14J/TE%20Connectivity%20ALCOSWITCH%20Switches/view-part/?ref=snap
U1: "IC REG BOOST ADJ 3A SYNC 8MSOP", Case/Package=MSOP, Manufacturer 1=Diodes, Max Input Voltage=4.75V, Max Operating Temperature=85°C, Max Output Voltage=5V, Min Input Voltage=900mV, Min Operating Temperature=-40°C, Min Output Voltage=2.5V, Operating Supply Current=1uA, Output Current=3A, Package Quantity=2500, Switching Frequency=1MHz, ComponentLink1Description=http://www.mouser.com/ds/2/115/PAM2401-347378.pdf?src-supplier=Mouser, ComponentLink1URL=http://www.mouser.com/ds/2/115/PAM2401-347378.pdf?src-supplier=Mouser, ComponentLink2Description=https://www.diodes.com/assets/Datasheets/PAM2401.pdf?src-supplier=Digi-Key, ComponentLink2URL=https://www.diodes.com/assets/Datasheets/PAM2401.pdf?src-supplier=Digi-Key, ComponentLink3Description=http://diodes.com/datasheets/PAM2401.pdf?src-supplier=Avnet, ComponentLink3URL=http://diodes.com/datasheets/PAM2401.pdf?src-supplier=Avnet, DigiKey=PAM2401SCADJDICT-ND, Lead Free="Lead Free", Manufacturer Part Number=PAM2401SCADJ, Min Supply Voltage=900mV, Mount="Surface Mount", Number of Outputs=1, Number of Pins=8, Output Configuration=Positive, Output Type=Adjustable, Packaging="Tape and Reel", Pricing 1="1=0.99000, 10=0.88500, 25=0.84000, 100=0.64500, 250=0.57000, 500=0.54000, 1000=0.42000 (USD)", RoHS=Yes, Stock 1=42065, Supplier 1=Digi-Key, Synchronous Rectifier=Yes, Topology=Boost, Weight=0.004938oz
U2: "WiFi 802.11b/g/n Transceiver Module 2.4GHz", Case/Package=QFN-56, Manufacturer 1="Espressif Systems", Manufacturer Part Number=ESP32-S2FH4
U3: "SERIAL TIME CHIP 8PIN, SOIC", Case/Package=SOIC, Frequency=32.768kHz, Manufacturer 1=Maxim, Max Operating Temperature=70°C, Max Supply Voltage=5.5V, Min Operating Temperature=0°C, Min Supply Voltage=4.5V, Operating Supply Current=1.5mA, Operating Supply Voltage=5V, Package Quantity=100, ComponentLink1Description=https://datasheet.ciiva.com/20167/170004-da-en-01-20167204.pdf?src-supplier=Rapid+Electronics, ComponentLink1URL=https://datasheet.ciiva.com/20167/170004-da-en-01-20167204.pdf?src-supplier=Rapid+Electronics, ComponentLink2Description=https://datasheet.ciiva.com/1491/ds1307-1491905.pdf?src-supplier=Element14, ComponentLink2URL=https://datasheet.ciiva.com/1491/ds1307-1491905.pdf?src-supplier=Element14, ComponentLink3Description=https://datasheet.ciiva.com/1498/ds1307-1498866.pdf?src-supplier=Farnell, ComponentLink3URL=https://datasheet.ciiva.com/1498/ds1307-1498866.pdf?src-supplier=Farnell, ComponentLink4Description=https://datasheet.ciiva.com/1139/46359-1139142.pdf?src-supplier=Element14, ComponentLink4URL=https://datasheet.ciiva.com/1139/46359-1139142.pdf?src-supplier=Element14, ComponentLink5Description=https://datasheet.ciiva.com/14085/ds1307-14085608.pdf?src-supplier=Digi-Key, ComponentLink5URL=https://datasheet.ciiva.com/14085/ds1307-14085608.pdf?src-supplier=Digi-Key, ComponentLink6Description=https://datasheet.ciiva.com/3304/ds1307-3304457.pdf?src-supplier=Avnet, ComponentLink6URL=https://datasheet.ciiva.com/3304/ds1307-3304457.pdf?src-supplier=Avnet, ComponentLink7Description=https://datasheet.ciiva.com/14577/70127931-14577227.pdf?src-supplier=Allied+Electronics, ComponentLink7URL=https://datasheet.ciiva.com/14577/70127931-14577227.pdf?src-supplier=Allied+Electronics, Contact Plating=Tin,Matte, Date Format=YY-MM-DD, DigiKey=DS1307Z+-ND, Height=1.5mm, Interface=I2C,Serial,2-Wire, Lead Free="Lead Free", Length=5mm, Logic Function=Clock, Manufacturer Part Number=DS1307Z+, Memory Size=56B, Memory Type=RAM, Mount="Surface Mount", Number of Outputs=1, Number of Pins=8, Packaging=Rail/Tube, Pricing 1="1=3.82000, 10=3.43200, 25=3.24480, 100=2.81200, 250=2.66780, 500=2.39380, 1000=2.26500 (USD)", Radiation Hardening=No, REACH SVHC="No SVHC", RoHS=Yes, RoHS Compliant=Yes, Series=DS1307Z, Stock 1=492, Supplier 1=Digi-Key, Time Format=HH:MM:SS, Voltage=5V, Weight=0.019048oz, Width=4mm
X1: library part CRYSTAL_1_1, "40MHz ±10ppm 10pF 30Ω SMD-3225 SMD Crystal Resonators RoHS", Case/Package=SMD-3225, Frequency=40MHz, Manufacturer Part Number=7M40000049, ComponentLink1Description=https://datasheet.ciiva.com/3852/part27-3852098.pdf?src-supplier=Arrow+Electronics, ComponentLink1URL=https://datasheet.ciiva.com/3852/part27-3852098.pdf?src-supplier=Arrow+Electronics, ComponentLink2Description=https://datasheet.ciiva.com/852/p79e-852307.pdf?src-supplier=Digi-Key, ComponentLink2URL=https://datasheet.ciiva.com/852/p79e-852307.pdf?src-supplier=Digi-Key, ComponentLink3Description=https://datasheet.ciiva.com/852/p79e-852308.pdf?src-supplier=Digi-Key, ComponentLink3URL=https://datasheet.ciiva.com/852/p79e-852308.pdf?src-supplier=Digi-Key, ComponentLink4Description=https://datasheet.ciiva.com/1369/l0445e-1369908.pdf?src-supplier=Farnell, ComponentLink4URL=https://datasheet.ciiva.com/1369/l0445e-1369908.pdf?src-supplier=Farnell, ComponentLink5Description=https://datasheet.ciiva.com/852/p79e-852309.pdf?src-supplier=Digi-Key, ComponentLink5URL=https://datasheet.ciiva.com/852/p79e-852309.pdf?src-supplier=Digi-Key, ComponentLink6Description=https://datasheet.ciiva.com/1361/p79e-1361573.pdf?src-supplier=Element14, ComponentLink6URL=https://datasheet.ciiva.com/1361/p79e-1361573.pdf?src-supplier=Element14, ComponentLink7Description=https://datasheet.ciiva.com/1369/l0445e-1369909.pdf?src-supplier=Farnell, ComponentLink7URL=https://datasheet.ciiva.com/1369/l0445e-1369909.pdf?src-supplier=Farnell, ComponentLink8Description=https://datasheet.ciiva.com/1392/p79e-1392982.pdf?src-supplier=Newark, ComponentLink8URL=https://datasheet.ciiva.com/1392/p79e-1392982.pdf?src-supplier=Newark
Y1 Y2: library part XTAL, "Crystal Oscillator", LatestRevisionDate=17-Jul-2002, LatestRevisionNote="Re-released for DXP Platform.", P/N=X308032768KGB2SC, PackageDescription="Crystal, Thru-Hole; 2 Leads; Body 3.1 x 8.2 mm (Dia.xH)", PackageReference=R38, Published=8-Jun-2000, Publisher="Altium Limited"

## Free pads (board coordinates)
  round 137.8 hole 78.74: ""(116.93,1359.45) ""(119.68,699.61) ""(1640.55,138.58) ""(1640.55,1359.06)

## Via types
v1: diameter 17.99, hole 7.87, Top Layer to Bottom Layer, tented both sides, 366 vias
v2: diameter 27.56, hole 19.68, Top Layer to Bottom Layer, tented both sides, 9 vias
v3: diameter 17.99, hole 7.87, Top Layer to Bottom Layer, 2 vias

## Nets (pads, with @x,y where several pads share a name; then routed paths per layer and width w, separated by ;. In a path a pad name is that pad's centre, name@x,y a point inside that pad or via, vN(x,y) a via of type N, cw(c..) or ccw(c..) an arc to the next point about the centre after c; other vN are vias at no path point)
3V3: C1.2 C2.2 C6.2 C7.2 C8.2 C18.1 C19.1 C20.1 C24.1 C25.1 C26.1 D2.A L2.1 P3.6 Q2.3 R1.2 R5.2 R7.2 R8.2 R9.2 R10.1 U1.7 U2.1 U2.20 U2.27 U2.45 U2.51 U2.54 | length 597.6
  Top Layer w10: v1(428.16,504.92) 398.8,504.92 399.2,504.52 R9.2 R8.2 ; v1(513.51,563.42) 513.67,563.26 513.67,544.45 R7.2 ; v1(695.87,289.37) R5.2 ; v1(740.16,1305.12) R10.1 ; U2.27 v1(833.39,1246.44) ; v1(834.69,927.21) 837,927.21 849.06,939.27 U2.45 U2.45 ; v1(935.04,922.24) 935.04,925.49 943.12,933.57 U2.51@943.12,956.61 ; U2.20 943.7,1220.97 943.7,1238.06 950.31,1244.67 951.17,1244.67 957.17,1250.67 v1(959.33,1250.67) ; U2.54@991.12,956.86 991.12,932.4 997.05,926.47 v1(997.05,923.23)
  Bottom Layer w6: v1(935.04,922.24) 935.04,959.35 C19.1 ; C20.1 977,943.28 v1(997.05,923.23)
  Bottom Layer w10: R1.2 379.49,1204.64 402.94,1228.08 402.94,1254.9 U1.7
  Bottom Layer w25: v1(834.69,927.21) 834.69,946 C18.1
  other v1: 662.13,452.76 702.13,452.76 742.13,452.76 782.13,452.76 742.13,492.76 782.13,492.76 616.22,773.27 656.22,773.27 696.22,773.27 736.22,773.27 616.22,813.27 656.22,813.27 696.22,813.27 736.22,813.27 709.65,960.63 749.65,960.63 1054.13,964.57 709.65,1000.63 749.65,1000.63 709.65,1094.49 749.65,1094.49 709.65,1134.49 749.65,1134.49 1174.21,1290.35 1214.21,1290.35 1174.21,1330.35 1214.21,1330.35 335,1366.85 375,1366.85 1174.21,1370.35 1214.21,1370.35 335,1406.85 375,1406.85 415,1406.85 1174.21,1410.35 1214.21,1410.35 255,1446.85 295,1446.85 335,1446.85 375,1446.85 415,1446.85 455,1446.85 495,1446.85
+4.7: C15.1 C21.1 D3.K U3.8
Batt_Volt: C3.2 D1.1 L1.1 P1.1 P2.1 R11.2 U1.2 U1.3 U3.3 | length 1260.5
  Bottom Layer w10: U1.2 410.65,1107.1 410.65,1131.09 631.93,1352.36 775.59,1352.36 828.74,1299.21 1098.74,1299.21 1152.23,1245.72 R11.2
  Bottom Layer w30: v1(246.69,227.99) 323.46,227.99 450,354.53 U3.3
  other v1: 166.69,147.99 206.69,147.99 246.69,147.99 166.69,187.99 206.69,187.99 246.69,187.99 166.69,227.99 206.69,227.99
Battery_Voltage: R11.1 R12.2 U2.10 | length 169
  Top Layer w10: U2.10 1051.97,1128.45 1084.16,1128.45 v1(1084.65,1128.94)
  Bottom Layer w10: v1(1084.65,1128.94) 1150.79,1128.94 R12.2
  Bottom Layer w20: R12.2 R11.1
Boot: C11.2 P3.3 S1.2 U2.5 | length 1115.9
  Top Layer w6: U2.5 1053.81,1051.55 1068.08,1051.55 1081.67,1065.14 v1(1081.67,1066.89)
  Top Layer w10: C11.2 1156.39,583.31 S1.2 1180,143.63 P3.3
  Bottom Layer w6: v1(1081.67,1066.89) 1079.37,1064.59 1079.37,1058.85 1077.9,1057.37 1077.9,953.6 1128.94,902.56 1128.94,583.55 v1(1128.7,583.31)
GND: A1.2 C1.1 C2.1 C3.1 C4.1 C5.1 C6.1 C7.1 C8.1 C9.2 C10.2 C11.1 C12.1 C13.1 C15.2 C16.1 C17.2 C18.2 C19.2 C20.2 C21.2 C22.1 C23.1 C24.2 C25.2 C26.2 P1.2 P3.1 Q1.4 Q3.3 R2.2 R4.2 R12.1 S1.1 S2.2 S2.4 S3.1 S3.2 U1.4 U1.8 U2.57 U3.4 X1.2 X1.4 | length 42.2
  Top Layer w10: v1(1257.68,926.06) 1260.79,926.06 1271.96,914.89 A1.2
  other v1: 82.68,24.61 141.73,24.61 200.79,24.61 259.84,24.61 318.9,24.61 377.95,24.61 437.01,24.61 496.06,24.61 555.12,24.61 614.17,24.61 673.23,24.61 732.28,24.61 791.34,24.61 850.39,24.61 909.45,24.61 968.5,24.61 1027.56,24.61 1086.61,24.61 1145.67,24.61 1204.72,24.61 1263.78,24.61 1322.83,24.61 1381.89,24.61 1440.94,24.61 1500,24.61 26.57,26.57 1500,75.3 25.59,93.5 312.79,99.29 608.07,99.29 667.12,99.29 726.18,99.29 785.23,99.29 844.29,99.29 1375.79,99.29 1500,125.98 25.59,152.56 608.07,158.35 667.12,158.35 726.18,158.35 785.23,158.35 844.29,158.35 1080.51,158.35 1375.79,158.35 1500,176.67 25.59,211.61 608.07,217.4 667.12,217.4 726.18,217.4 785.23,217.4 844.29,217.4 903.34,217.4 962.4,217.4 1139.56,217.4 1322.83,227.36 1381.89,227.36 1440.94,227.36 1500,227.36 1259.84,228.35 25.59,270.67 549.01,276.46 608.07,276.46 667.12,276.46 844.29,276.46 962.4,276.46 1139.56,276.46 1257.68,276.46 25.59,329.72 489.96,335.51 608.07,335.51 667.12,335.51 844.29,335.51 962.4,335.51 1257.68,335.51 25.59,388.78 608.07,394.57 667.12,394.57 844.29,394.57 962.4,394.57 1139.56,394.57 1257.68,394.57 726.38,397.64 25.59,447.84 371.85,453.62 608.07,453.62 903.34,453.62 962.4,453.62 1139.56,453.62 1257.68,453.62 25.59,506.89 76.57,512.68 135.63,512.68 1257.68,512.68 600.12,548.66 566.93,563.98 25.59,565.95 76.57,571.73 135.63,571.73 371.85,571.73 1257.68,571.73 25.59,625 371.85,630.79 1257.68,630.79 25.59,684.06 1257.68,689.84 1046.16,691.93 1180.12,696.85 926.18,727.36 25.59,743.11 194.68,748.9 549.01,748.9 1198.62,748.9 1257.68,748.9 875,788.39 1052.31,787.55 25.59,802.17 76.57,807.95 135.63,807.95 194.68,807.95 489.96,807.95 549.01,807.95 844.29,807.95 1198.62,807.95 1257.68,807.95 273.35,816.37 1052.31,818.48 879.92,830.71 1079.72,830.71 25.59,861.22 76.57,867.01 135.63,867.01 194.68,867.01 253.74,867.01 312.79,867.01 608.07,867.01 667.12,867.01 726.18,867.01 844.29,867.01 1198.62,867.01 1257.68,867.01 904.18,867.76 1040.35,888.78 25.59,920.28 1079.54,925.09 76.57,926.06 135.63,926.06 194.68,926.06 253.74,926.06 312.79,926.06 667.12,926.06 1198.62,926.06 1243.11,943.9 1113.33,945.03 1131.15,974.41 1162.89,974.41 1194.64,974.41 1226.38,974.41 1096.89,977.36 25.59,979.33 76.57,985.12 135.63,985.12 194.68,985.12 253.74,985.12 312.79,985.12 608.07,985.12 661.42,1025.59 607.28,1027.56 1129.43,1030.51 1161.17,1030.51 1192.91,1030.51 1224.66,1030.51 1256.4,1030.51 25.59,1038.39 76.57,1044.17 135.63,1044.17 194.68,1044.17 253.74,1044.17 312.79,1044.17 1185.04,1062.99 1256.89,1062.99 25.59,1097.44 661.42,1101.38 76.57,1103.23 135.63,1103.23 194.68,1103.23 253.74,1103.23 312.79,1103.23 608.07,1103.23 1257.68,1103.23 1257.68,1103.23 25.59,1156.5 1107.28,1161.42 76.57,1162.28 135.63,1162.28 194.68,1162.28 253.74,1162.28 312.79,1162.28 371.85,1162.28 489.96,1162.28 549.01,1162.28 608.07,1162.28 1257.68,1162.28 665.35,1177.17 1107.28,1210.63 25.59,1215.55 76.57,1221.34 135.63,1221.34 194.68,1221.34 253.74,1221.34 549.01,1221.34 608.07,1221.34 667.12,1221.34 1080.51,1221.34 1257.68,1221.34 1103.35,1257.87 25.59,1274.61 76.57,1280.39 194.68,1280.39 253.74,1280.39 489.96,1280.39 608.07,1280.39 667.12,1280.39 726.18,1280.39 1257.68,1280.39 1143.7,1294.29 848.43,1325.79 965.55,1325.79 25.59,1333.66 253.74,1339.45 489.96,1339.45 549.01,1339.45 1021.45,1339.45 1080.51,1339.45 1139.56,1339.45 1257.68,1339.45 25.59,1392.72 194.68,1398.5 253.74,1398.5 489.96,1398.5 549.01,1398.5 608.07,1398.5 667.12,1398.5 726.18,1398.5 785.23,1398.5 844.29,1398.5 962.4,1398.5 1021.45,1398.5 1080.51,1398.5 1139.56,1398.5 1257.68,1398.5 25.59,1451.77 76.57,1457.56 135.63,1457.56 194.68,1457.56 549.01,1457.56 608.07,1457.56 667.12,1457.56 726.18,1457.56 785.23,1457.56 844.29,1457.56 903.34,1457.56 962.4,1457.56 1021.45,1457.56 1080.51,1457.56 1139.56,1457.56 1198.62,1457.56 1257.68,1457.56 25.59,1510.83 84.65,1510.83 134.84,1510.83 193.9,1510.83 252.95,1510.83 312.01,1510.83 371.06,1510.83 430.12,1510.83 489.17,1510.83 548.23,1510.83 607.28,1510.83 666.34,1510.83 725.39,1510.83 784.45,1510.83 843.5,1510.83 902.56,1510.83 961.61,1510.83 1020.67,1510.83 1079.72,1510.83 1138.78,1510.83 1197.83,1510.83 1256.89,1510.83
  other v2: 865.01,1034.01 920.01,1034.01 975.01,1034.01 865.01,1089.01 920.01,1089.01 975.01,1089.01 865.01,1144.01 920.01,1144.01 975.01,1144.01
Motor_Signal: R3.2 U2.39 | length 951.9
  Top Layer w6: R3.2@176.75,435.31 176.75,513.37 v1(375.98,712.6) ; v1(518.7,755.91) 518.7,836.55 714.11,1031.96 786.19,1031.96 U2.39@787.86,1033.63
  Bottom Layer w6: v1(375.98,712.6) 376.66,712.6 419.97,755.91 v1(518.7,755.91)
NetA1_1: A1.1 C12.2 L3.1 | length 101.9
  Top Layer w10: L3.1@1194.65,1000 1197.59,1002.95 C12.2@1244.09,1002.95 ; C12.2@1244.09,1002.95 A1.1
NetC4_2: C4.2 U2.53 X1.1 | length 141.2
  Top Layer w6: U2.53 975.12,894.96 C4.2
  Top Layer w10: C4.2 981.3,853.35 981.38,853.27 981.38,848.35 999.02,830.71 X1.1
NetC5_2: C5.2 U2.52 X1.3 | length 224
  Top Layer w6: X1.3 922.24,767.72 959.65,805.12 959.65,871.06 C5.2 959.12,905.97 U2.52@959.12,956.86
NetC9_1: C9.1 L2.2 U2.3 U2.4
NetC13_2: C13.2 L3.2 U2.2 | length 110.8
  Top Layer w11.55: U2.2 1051.94,1002.44 1110.75,1002.44 C13.2@1113.19,1000 ; C13.2 L3.2
NetC14_1: C14.1 D2.K D3.A
NetC14_2: C14.2 Q2.2 Q3.2 | length 497.3
  Top Layer w20: v1(717.52,572.83) v1(737.2,572.83) v1(848.43,572.83) v1(869.09,572.83)
  Bottom Layer w20: v1(717.52,572.83) v1(737.2,572.83) 756.51,572.83 Q2.2 759.21,575.54 759.21,585.38 786.76,612.92 860.74,612.92 Q3.2@888,585.66 ; v1(848.43,572.83) v1(869.09,572.83) 889.82,572.83 Q3.2 890.4,583.26 Q3.2@888,585.66 ; C14.2 Q3.2@888,585.66
NetC22_2: C22.2 R13.1 U2.21 Y2.1 | length 198
  Top Layer w6: Y2.1 cw(c900.59,1377.95) 926.18,1377.95 C22.2 R13.1 927.03,1261.95 927.03,1221.74 U2.21
NetC23_2: C23.2 R13.2 U2.22 Y2.2 | length 169.5
  Top Layer w6: Y2.2 900.59,1371.57 ccw(c900.59,1357.79) 886.81,1357.79 C23.2 886.81,1260.83 910.2,1237.43 910.2,1222.81 U2.22
NetD1_2: D1.2 P2.2 Q1.1 Q1.2 Q1.5 Q1.6
NetL1_2: L1.2 U1.1
NetQ1_3: Q1.3 R3.1 R4.1
NetQ2_1: Q2.1 Q3.1 R6.1 | length 362.7
  Bottom Layer w10: Q2.1@682.6,570.77 722.86,530.51 775.65,530.51 812.15,567.02 815.6,570.46 815.6,563.57 822.41,556.76 851.61,527.56 915.81,527.56 945.29,557.04 945.29,578.92 R6.1
NetR1_1: R1.1 R2.1 U1.5 | length 129.2
  Bottom Layer w10: R2.1 R1.1 355.01,1259.36 U1.5
NetR10_2: R10.2 U2.24 | length 126.8
  Top Layer w6: R10.2 798.23,1303.15 831.69,1269.68 846.1,1269.68 878.71,1237.08 878.71,1231.67 880.63,1229.75 U2.24
NetU3_1: U3.1 Y1.2 | length 130.7
  Bottom Layer w6: Y1.2 ccw(c518,370.25) 550,370.25 U3.1
NetU3_2: U3.2 Y1.1 | length 91.2
  Bottom Layer w6: U3.2 500,387.75 ccw(c518,387.75) Y1.1
RESET: C10.1 P3.2 R5.1 S2.1 S2.3 U2.56 | length 1475.1
  Top Layer w6: R5.1 751.93,348.43 762.05,358.54 893.94,358.54 895.2,357.28 978.35,357.28 ; U2.56 1024.28,955.19 1024.28,944.4 1065.16,903.53 C10.1@1072,896.68 ; C10.1@1079.79,889.7 1097.85,889.7 1107.78,879.77 1107.78,701 1067.91,661.14 1067.91,446.85 978.35,357.28 ; v1(1137.8,357.28) 978.35,357.28
  Bottom Layer w6: v1(1137.8,357.28) 1178.15,316.93 1178.15,245.48 P3.2
Rx: P3.4 U2.49 | length 950.7
  Top Layer w6: v1(907.48,918.31) 907.48,921.55 912.13,926.2 U2.49@912.13,954.28
  Bottom Layer w6: v1(907.48,918.31) 907.81,917.98 907.81,905.18 1088.58,724.41 1088.58,200.42 1127.17,161.84 P3.4
SCL: R8.1 U2.38 U3.6 | length 847.7
  Top Layer w6: v1(450.79,623.03) 450.79,626.28 445.87,631.2 445.87,968.5 526.99,1049.63 U2.38
  Top Layer w10: R8.1@450.79,539.27 v1(450.79,623.03)
  Bottom Layer w10: U3.6 450.39,662.91 450.39,623.43 v1(450.79,623.03)
SDA: R9.1 U2.37 U3.5 | length 895.8
  Top Layer w6: v1(399.61,622.05) 399.61,622.7 410.43,633.53 410.43,982.28 493.78,1065.63 U2.37@787.86,1065.63
  Top Layer w10: R9.1 v1(399.61,622.05)
  Bottom Layer w10: v1(399.61,622.05) 399.8,622.24 399.8,663.1 U3.5
SQ_OUT: R6.2 U2.42 | length 487.6
  Top Layer w6: U2.42 788.11,685.32 831.69,641.73 v1(925.2,641.73)
  Bottom Layer w6: v1(925.2,641.73) 947.47,641.73 950.42,644.68 953.38,641.73 R6.2
Tx: P3.5 U2.48 | length 931.7
  Top Layer w6: v1(875.98,919.29) 894.46,937.76 894.46,955.19 U2.48
  Bottom Layer w6: v1(875.98,919.29) 875.98,869.09 1027.17,717.91 P3.5
VDD_SPI: C17.1 U2.30 | length 64.3
  Top Layer w10: C17.1 725.96,1175.61 U2.30
WIFI: C16.2 R7.1 S3.3 S3.4 U2.28 | length 1498.4
  Top Layer w6: R7.1 C16.2 595.32,504.92 605.82,515.42 680.36,515.42 709.24,544.29 946.76,544.29 975.64,515.42 S3.4 990.16,520.09 v3(990.16,558.07) ; v3(758.08,1249.22) 798.17,1249.22 817.64,1229.75 U2.28
  Bottom Layer w6: v3(758.08,1249.22) 757.09,1249.22 685.61,1177.74 685.61,954.22 811.53,828.3 850.8,828.3 867.39,811.71 878.54,811.71 990.16,700.09 v3(990.16,558.07)
pads on no net: U1.6 U2.6 U2.7 U2.8 U2.9 U2.11 U2.12 U2.13 U2.14 U2.15 U2.16 U2.17 U2.18 U2.19 U2.23 U2.25 U2.26 U2.29 U2.31 U2.32 U2.33 U2.34 U2.35 U2.36 U2.40 U2.41 U2.43 U2.44 U2.46 U2.47 U2.50 U2.55 U3.7

## Polygon pours and split planes (outlines as drawn)
GND on Bottom Layer "GND_L04_P000" (solid, remove dead copper, pour order 0): 0.72,1535.86 1269.42,1535.86 1269.42,242.55 1517.72,242.55 1517.72,0 0,0
GND on GND "GND_L02_P001" (solid, pour order 1): 0.72,1535.86 1269.42,1535.86 1269.42,242.55 1517.72,242.55 1517.72,0 0,0
3V3 on Power "3V3_L03_P004" (solid, pour order 4): 0.72,1535.86 1269.42,1535.86 1269.42,242.55 1517.72,242.55 1517.72,0 0,0
GND on Top Layer "GND_L01_P003" (solid, remove dead copper, pour order 3): 0.72,1535.86 1269.42,1535.86 1269.42,242.55 1517.72,242.55 1517.72,0 0,0

## Other copper
Top Layer:
  pour cut-out: 583.81,488.07 532.64,488.08 532.64,521.76 597.75,521.76 594.49,518.5 594.49,495.08
  pour cut-out: 380.8,488.08 380.8,561.13 418.2,561.13 418.42,560.91 418.42,488.08
  region net NetD1_2: 62.01,88.58 81.69,68.9 128.94,68.9 141,80.96 141,318.65 117.13,342.52 117.13,454.72 106.85,465 77.2,465 62.01,449.8
  region net Batt_Volt: 153,81.25 153,319 175,341 257,341 261,337 261,81.87 248.03,68.9 165.35,68.9
  pour cut-out: 1057.09,995.08 1081.07,995.3 1081.07,961.09 1060.08,940.11 1060.08,899.28 991.89,899.28 984.61,906.56 984.61,923.19
  pour cut-out: 677.06,292.21 677.06,365.27 714.46,365.27 714.68,365.05 714.68,292.21
  pour cut-out: 437.88,488.08 437.88,561.13 475.28,561.13 475.5,560.91 475.5,488.08
  pour cut-out: 494.97,488.08 494.97,561.13 532.37,561.13 532.59,560.91 532.59,488.08
  pour cut-out: 821.85,942.91 821.85,900.59 920.28,900.59 920.28,872.05 920.62,871.7 944.59,871.7 944.59,891.44 959.12,905.97 959.12,931.41
  pour cut-out: 742.02,1323.93 815.07,1323.93 815.07,1286.53 814.85,1286.31 742.02,1286.31
  pour cut-out: 1039.37,1207.68 1039.37,970.47 801.18,970.47 801.18,1207.68
  region net 3V3: 1038.39,986.22 1065.94,986.22 1069.88,982.28 1069.88,961.61 1060.04,951.77 1047.24,951.77 1038.39,960.63
  region net 3V3: 1149.26,1102.19 1153.02,1098.43 1198.82,1098.43 1227.36,1126.97 1227.36,1415.35 1217.52,1425.2 1168.31,1425.2 1161.42,1418.31 1161.42,1228.72 1149.26,1217.5
  region net NetC9_1: 1038.39,1016.73 1038.39,1038.39 1075.79,1038.39 1113.19,1075.79 1113.19,1120.23 1118.94,1125.98 1135.89,1125.98 1139.76,1122.11 1139.76,1057.1 1132.86,1050.2 1123.03,1050.2 1089.57,1016.73
  region net NetQ1_3: 127.72,392.42 136.72,401.43 273.72,401.43 283.72,391.43 283.72,358.43 273.72,348.43 135.72,348.43 127.72,356.43
Bottom Layer:
  region net 3V3: 322.83,1364.17 322.83,1406.5 299.21,1430.12 238.19,1430.12 225.39,1442.91 225.39,1463.58 240.16,1478.35 506.89,1478.35 519.68,1465.55 519.68,1431.1 507.87,1419.29 441.93,1419.29 427.17,1404.53 427.17,1300.2 416.34,1289.37 416.34,1231.3 397.64,1231.28 397.64,1289.37
  pour cut-out: 1129.28,1251.37 1129.28,1102.78 1178.72,1102.78 1178.72,1263.37
  pour cut-out: 518.81,488.21 531.19,488.21 538.19,481.21 538.19,474.66 516.57,474.66 518.81,476.9
  pour cut-out: 269.29,1349.66 269.29,1181.71 269.28,1181.69 373.85,1181.69 388.14,1195.99 387.8,1196.33 387.8,1287.4
  pour cut-out: 945.87,664.37 897.64,664.37 897.64,544.29 958.32,544.29 977.72,563.69 977.72,664.31
  pour cut-out: 1013.78,914.37 1004.92,905.51 845.85,905.51 842.52,908.84 842.52,941.93 1013.78,941.93
  region net 3V3: 934.06,1211.61 976.38,1211.61 990.16,1225.39 990.16,1254.92 977.36,1267.72 976.38,1266.73 802.17,1266.73 694.61,1159.18 694.61,957.95 710.63,941.93 1056.1,941.93 1068.9,954.72 1068.9,1010.83 1062.99,1016.73 1045.28,1016.73 1041.34,1012.8 1041.34,982.28 1034.45,975.39 840.55,975.39 809.06,1006.89 809.06,1202.76 817.91,1211.61
  region net 3V3: 650.59,494.09 667.32,510.83 784.45,510.83 797.24,498.03 797.24,449.8 786.42,438.98 659.45,438.98 650.59,447.83
  region net 3V3: 612.2,828.74 744.09,828.74 757.87,814.96 757.87,733.27 731.3,706.69 651.57,706.69 598.43,759.84 598.43,814.96
  region net NetC14_1: 771.65,747.05 792.32,767.72 875.98,767.72 904.53,739.17 904.53,707.68 898.62,701.77 868.11,701.77 851.38,685.04 851.38,644.68 836.61,629.92 789.37,629.92 771.65,647.64
  region net +4.7: 576.77,619.09 597.44,598.43 597.44,576.77 603.35,570.87 634.84,570.87 640.75,576.77 640.75,583.66 676.18,619.09 709.65,619.09 723.43,632.87 723.43,678.15 707.68,693.9 664.37,693.9 639.76,669.29 598.43,669.29 571.85,695.87 565.94,701.77 536.42,701.77 530.51,695.87 530.51,630.91 542.32,619.09
  region net NetL1_2: 424.21,1128.94 424.21,872.05 448.82,847.44 537.4,847.44 567.91,877.95 567.91,1075.79 514.76,1128.94
  region net Batt_Volt: 235,667 235,715.09 329.3,808 329.3,1043.13 342.18,1056 366,1056 372,1062 372,1130 373,1131 415,1131 415,776.22 353,714.22 353,416 571,198 571,73.95 562.01,64.96 448.82,64.96 441,72.78 441,127 396,172 319,172 261,114 261,79.9 249.02,67.91 162.4,67.91 153,77.31 153,585

## Silkscreen, mask and mechanical layers (free items; w line width, h text height)
Top Overlay:
  text "TERRA SPRAY" at 1591.54,957.68 h98.43 r270
  text "." at 1041.5,831.85 h60
  text "K" at 309.13,274.68 h30
  text "TX" at 1000.08,142.8 h25
  text "RX" at 1103.43,141.81 h25
  text "BOOT" at 1179.21,141.81 h25
  text "RST" at 1295.35,140.83 h25
  text "GND" at 1401.65,139.84 h25
  text "+3.3V" at 854.33,138.78 h25
  text "-" at 381.97,134.69 h30
  text "+" at 479.41,134.84 h30
  text "-" at 88.66,40.2 h30
  text "+" at 186.1,40.36 h30
Mechanical 2:
  the board outline again, w5

## Dimensions
0,0 to 0,1536.61 on Mechanical 2
0,1536.61 to 1779.53,1536.61 on Mechanical 2

## Text inside footprints (layer, text, board x,y; h text height)
P3: Bottom Overlay "1   2   3   4   5   6" at 1486,155 h82.68